# Altium PCB main.PcbDoc
Units mil, origin at the board's own origin, x right, y up, seen from the top; angles counter-clockwise.
Board outline 2165.35 x 3740.16 mil, 2 copper layers (Top Layer, Bottom Layer); 55 components, 37 nets, 239 pads, 53 vias.
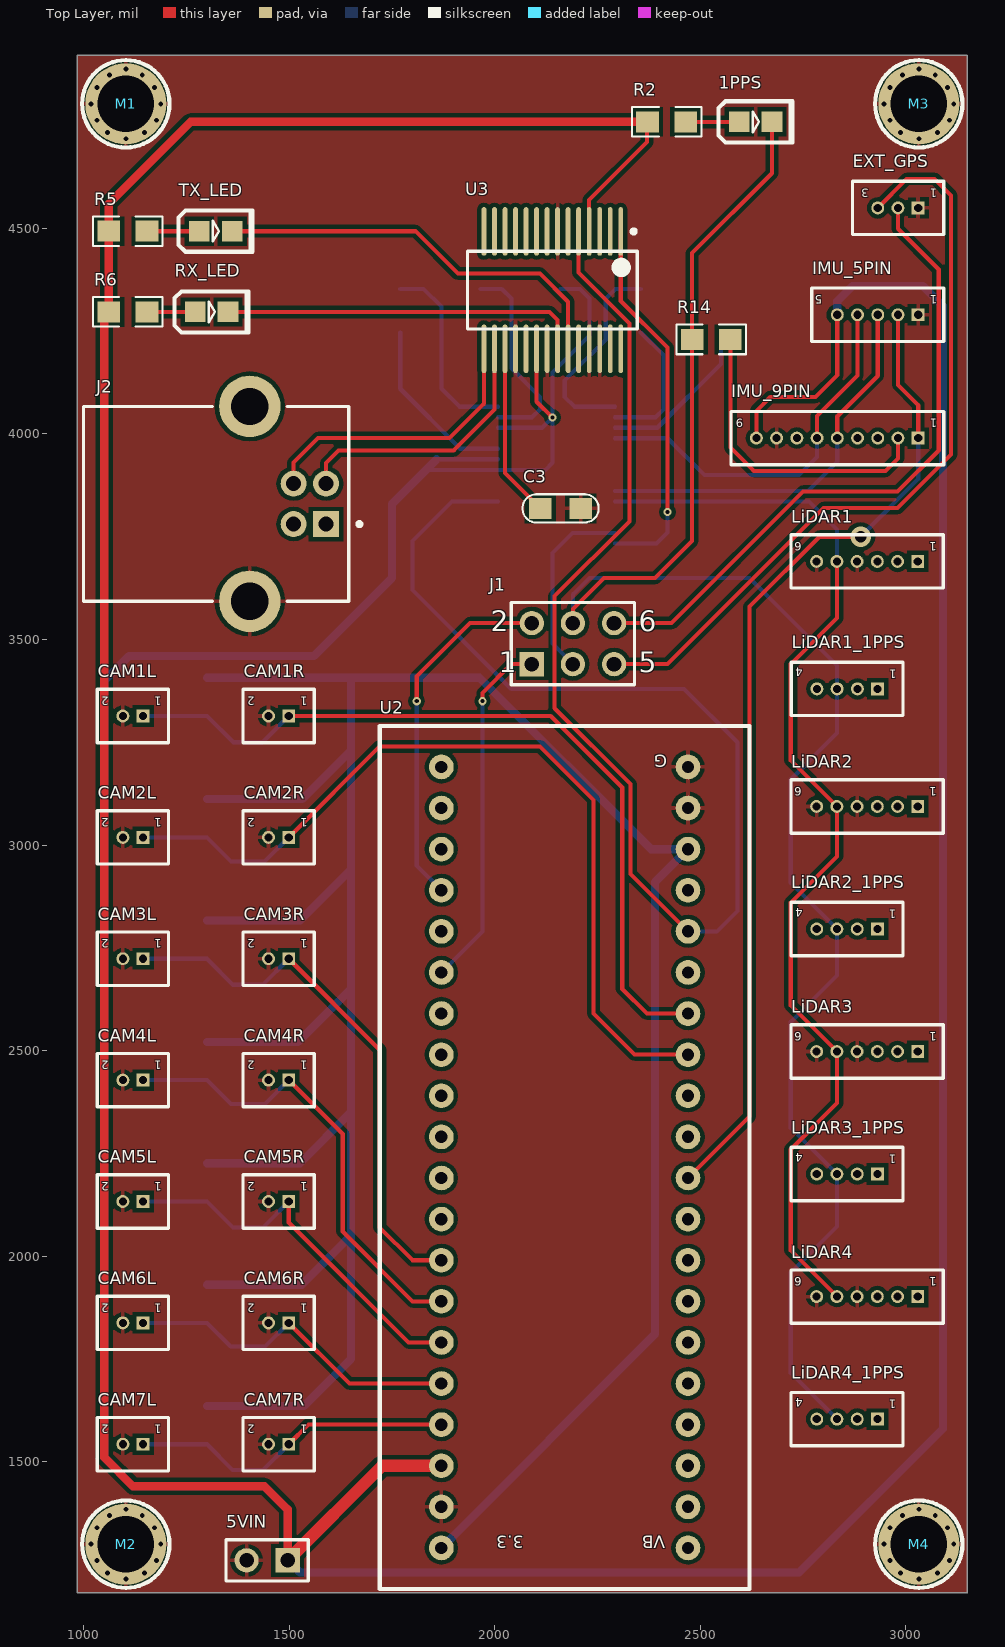
[diagram p0: Top Layer view]
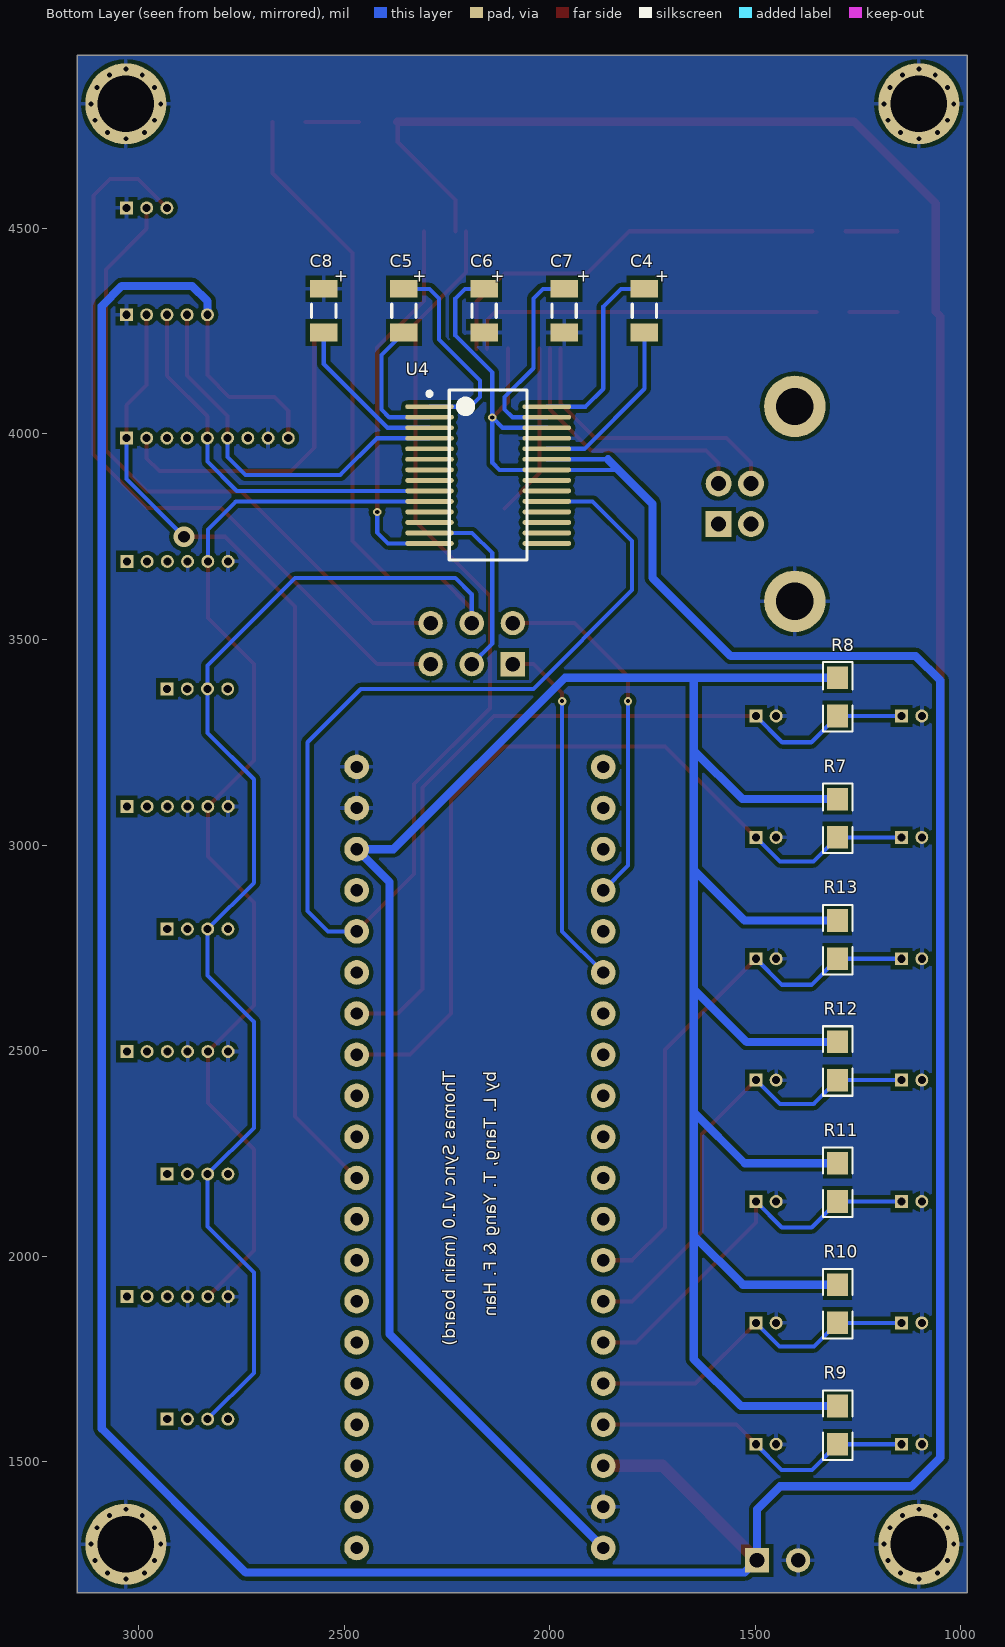
[diagram p1: Bottom Layer view, seen from below]

## Layer stack, top to bottom
Top Solder: solder mask 0.4, Solder Resist, Dk 3.5
Top Layer: signal copper 1.4
Dielectric 1: dielectric 12.6, FR-4, Dk 4.8
Bottom Layer: signal copper 1.4
Bottom Solder: solder mask 0.4, Solder Resist, Dk 3.5

## Board outline
984.25,4921.26 3149.61,4921.26 3149.61,1181.1 984.25,1181.1

## Design rules (kind name [scope] priority, off if disabled: settings)
Clearance [All] p1: gap=10
HoleSize [All] p1: absolutevalues=TRUE maxlimit=157.48 minlimit=0.98 maxpercent=80.000 minpercent=20.000
PolygonConnect [All] p1: connectstyle=Relief reliefconductorwidth=10 reliefentries=4 polygonreliefangle="90 Angle" airgapwidth=10
RoomDefinition main [InComponentClass('main')] p1: confinementstyle=ConfineIn formatcopy=TRUE lockcomponents=FALSE outline 984.25,1181.1 3149.61,1181.1 3149.61,4921.26 984.25,4921.26
RoutingVias [All] p1: holewidth=28 width=50 viastyle="Through Hole" minholewidth=28 minwidth=50 maxholewidth=28 maxwidth=50
SolderMaskExpansion [All] p1: expansion=4
Width [All] p1: maxlimit=80 minlimit=10 preferedwidth=10
29 further rules are at their usual default settings.

## Components (designator, comment, footprint, x,y, rotation, side; value= is the part's Value field where it differs from the comment)
1PPS "1PPS LED" 0805D 2594.33,4759.37 r0 top
5VIN "Header 2" HDR1X2 1496.06,1259.84 r180 top
C3 "0.1uF" 0805C 2204.72,3818.9 r180 top
C4 "0.1uF" C1206 1770,4300 r270 bottom
C5 "0.1uF" C1206 2355,4300 r270 bottom
C6 "0.1uF" C1206 2160,4300 r270 bottom
C7 "0.1uF" C1206 1965,4300 r270 bottom
C8 "0.1uF" C1206 2550,4300 r270 bottom
CAM1L "Header 2" 1.25mmP2 1144.33,3313.94 r180 top
CAM1R "Header 2" 1.25mmP2 1498.66,3313.94 r180 top
CAM2L "Header 2" 1.25mmP2 1144.33,3018.66 r180 top
CAM2R "Header 2" 1.25mmP2 1498.66,3018.66 r180 top
CAM3L "Header 2" 1.25mmP2 1144.33,2723.39 r180 top
CAM3R "Header 2" 1.25mmP2 1498.66,2723.39 r180 top
CAM4L "Header 2" 1.25mmP2 1144.33,2428.11 r180 top
CAM4R "Header 2" 1.25mmP2 1498.66,2428.11 r180 top
CAM5L "Header 2" 1.25mmP2 1144.33,2132.83 r180 top
CAM5R "Header 2" 1.25mmP2 1498.66,2132.83 r180 top
CAM6L "Header 2" 1.25mmP2 1144.33,1837.56 r180 top
CAM6R "Header 2" 1.25mmP2 1498.66,1837.56 r180 top
CAM7L "Header 2" 1.25mmP2 1144.33,1542.28 r180 top
CAM7R "Header 2" 1.25mmP2 1498.66,1542.28 r180 top
EXT_GPS "Header 3" 1.25mmP3 3030,4550 r180 top
IMU_5PIN "Header 5" 1.25mmP5 3030,4290 r180 top
IMU_9PIN "Header 9" 1.25mmP9 3030,3990 r180 top
J1 "Header 3X2" HDR2X3 2090,3440 r0 top
J2 "USB Header" USB2.5-2H4D 1550,3830 r180 top
LiDAR1 "Header 6" 1.25mmP6 3028.9,3690 r180 top
LiDAR1_1PPS "Header 4" 1.25mmP4 2931.26,3380 r180 top
LiDAR2 "Header 6" 1.25mmP6 3028.9,3093.82 r180 top
LiDAR2_1PPS "Header 4" 1.25mmP4 2930.83,2795.74 r180 top
LiDAR3 "Header 6" 1.25mmP6 3028.9,2497.65 r180 top
LiDAR3_1PPS "Header 4" 1.25mmP4 2930.83,2199.56 r180 top
LiDAR4 "Header 6" 1.25mmP6 3028.9,1901.47 r180 top
LiDAR4_1PPS "Header 4" 1.25mmP4 2930.83,1603.39 r180 top
M1 "Mount" 安装孔-3.5-5 1102.36,4803.15 r0 top
M2 "Mount" 安装孔-3.5-5 1102.36,1299.21 r0 top
M3 "Mount" 安装孔-3.5-5 3031.5,4803.15 r0 top
M4 "Mount" 安装孔-3.5-5 3031.5,1299.21 r0 top
R2 "1K" 0805R 2464.33,4759.37 r180 top
R5 "150R" 0805R 1060.94,4493.31 r0 top
R6 "120R" 0805R 1060.94,4297.01 r0 top
R7 "1K" 0805R 1300,3018.66 r90 bottom
R8 "1K" 0805R 1300,3313.94 r90 bottom
R9 "1K" 0805R 1300,1635.28 r270 bottom
R10 "1K" 0805R 1300,1930.56 r270 bottom
R11 "1K" 0805R 1300,2225.84 r270 bottom
R12 "1K" 0805R 1300,2521.11 r270 bottom
R13 "1K" 0805R 1300,2816.39 r270 bottom
R14 "0R" 0805R 2480,4230 r0 top
RX_LED "USB RX LED" 0805D 1270.94,4297.01 r0 top
TX_LED "USB TX LED" 0805D 1280.94,4493.31 r0 top
U2 "MCU" STM32Board 2170,2240 r180 top
U3 "FT232R" SSOP-28 2140,4350 r270 top
U4 "MAX3245" SSOP-28 2150,3900 r180 bottom

## Footprints (in the part's own frame and the unit in brackets; to place one, negate y for a bottom-side part, rotate by r counter-clockwise, add the part's x,y. Pads: shape width x height; smd on the part's side, far side on the other; paste and mask are expansions set on the pad)
1.25mmP2 [mm]
  rect 0.8x0.8 hole 0.5: 1(0,0)
  round 0.8 hole 0.5: 2(1.25,0)
  silkscreen extent -1.57,-1.65 2.83,1.65
1.25mmP3 [mm]
  rect 0.8x0.8 hole 0.5: 1(0,0)
  round 0.8 hole 0.5: 2(1.25,0) 3(2.5,0)
  silkscreen extent -1.58,-1.65 4.06,1.65
1.25mmP4 [mm]
  rect 0.8x0.8 hole 0.5: 1(0,0)
  round 0.8 hole 0.5: 2(1.25,0) 3(2.5,0) 4(3.75,0)
  silkscreen extent -1.58,-1.65 5.33,1.65
1.25mmP5 [mm]
  rect 0.8x0.8 hole 0.5: 1(0,0)
  round 0.8 hole 0.5: 2(1.25,0) 3(2.5,0) 4(3.75,0) 5(5,0)
  silkscreen extent -1.58,-1.65 6.57,1.65
1.25mmP6 [mm]
  rect 0.8x0.8 hole 0.5: 1(0,0)
  round 0.8 hole 0.5: 2(1.25,0) 3(2.5,0) 4(3.75,0) 5(5,0) 6(6.25,0)
  silkscreen extent -1.58,-1.65 7.82,1.65
1.25mmP9 [mm]
  rect 0.8x0.8 hole 0.5: 1(0,0)
  round 0.8 hole 0.5: 2(1.25,0) 3(2.5,0) 4(3.75,0) 5(5,0) 6(6.25,0) 7(7.5,0) 8(8.75,0) 9(10,0)
  silkscreen extent -1.58,-1.65 11.57,1.65
0805C [mm]
  rect 1.4x1.3 smd: 1(-0.102,0) 2(2.388,0)
  silkscreen extent -1.22,-0.88 3.49,0.87
0805D [mil] "二?"
  rect 50x50 smd: 1(0,0) 2(80,0)
  silkscreen extent -50,-50 130,50
0805R [mm]
  rect 1.4x1.3 smd: 1(0,0) 2(2.362,0)
  silkscreen extent -0.97,-0.91 3.33,0.91
C1206 [mm] "Chip Capacitor, Body 3.2x1.6mm, IPC High Density"
  rect 1.1x1.7 smd: 1(-1.35,0) 2(1.35,0)
  silkscreen extent -0.4,-0.75 0.4,0.75, body extent -1.7,-0.9 1.7,0.9, height 1.3
HDR1X2 [mm] "Connector; Header; 2 Position"
  rect 1.5x1.5 hole 0.9: 1(0,0)
  round 1.5 hole 0.9: 2(2.54,0)
  silkscreen extent -1.27,-1.27 3.81,1.27
HDR2X3 [mm] "Connector; Header; 3x2 Position"
  rect 1.5x1.5 hole 0.9: 1(0,0)
  round 1.5 hole 0.9: 2(0,2.54) 3(2.54,0) 4(2.54,2.54) 5(5.08,0) 6(5.08,2.54)
  silkscreen extent -1.27,-1.27 6.35,3.81
SSOP-28 [mm] "SOP, 28-Leads, Body 10.20x5.45mm, Pitch 0.65mm, IPC Medium Density"
  oval 3x0.3 smd: 1(-3.625,4.225) 2(-3.625,3.575) 3(-3.625,2.925) 4(-3.625,2.275) 5(-3.625,1.625) 6(-3.625,0.975) 7(-3.625,0.325) 8(-3.625,-0.325) 9(-3.625,-0.975) 10(-3.625,-1.625) 11(-3.625,-2.275) 12(-3.625,-2.925) 13(-3.625,-3.575) 14(-3.625,-4.225) 15(3.625,-4.225) 16(3.625,-3.575) 17(3.625,-2.925) 18(3.625,-2.275) 19(3.625,-1.625) 20(3.625,-0.975) 21(3.625,-0.325) 22(3.625,0.325) 23(3.625,0.975) 24(3.625,1.625) 25(3.625,2.275) 26(3.625,2.925) 27(3.625,3.575) 28(3.625,4.225)
  silkscreen extent -3.75,-5.25 2.4,5.25, body extent -2.8,-5.25 2.8,5.25, height 2
STM32Board [mil] "STM32 board"
  round 60 hole 30: 1(-300,950) 2(-300,850) 3(-300,750) 4(-300,650) 5(-300,550) 6(-300,450) 7(-300,350) 8(-300,250) 9(-300,150) 10(-300,50) 11(-300,-50) 12(-300,-150) 13(-300,-250) 14(-300,-350) 15(-300,-450) 16(-300,-550) 17(-300,-650) 18(-300,-750) 19(-300,-850) 20(-300,-950) 21(300,950) 22(300,850) 23(300,750) 24(300,650) 25(300,550) 26(300,450) 27(300,350) 28(300,250) 29(300,150) 30(300,50) 31(300,-50) 32(300,-150) 33(300,-250) 34(300,-350) 35(300,-450) 36(300,-550) 37(300,-650) 38(300,-750) 39(300,-850) 40(300,-950)
  silkscreen extent -450,-1050 450,1050
USB2.5-2H4D [mm] "Connector; USB1.1, Type B, Thru-Hole; 4 Position; Right Angle"
  rect 1.6x1.6 hole 0.92: 1(-1,1.25)
  round 1.6 hole 0.92: 2(-1,-1.25) 3(1,-1.25) 4(1,1.25)
  round 3.8 hole 2.3: 5(3.71,6.02) 6(3.71,-6.02)
  silkscreen extent -3.18,-6.02 13.99,6.02
安装孔-3.5-5 [mm]
  round 5 hole 3.5: 1(0,0)
  silkscreen extent -2.7,-2.7 2.7,2.7

## Part data
1PPS: library part LED2, "BLUE"
5VIN CAM1L CAM1R CAM2L CAM2R CAM3L CAM3R CAM4L CAM4R CAM5L CAM5R CAM6L CAM6R CAM7L CAM7R: "Header, 2-Pin"
C3: library part Cap, "Capacitor"
C4 C5 C6 C7 C8: library part "Cap Pol3", "Polarized Capacitor (Surface Mount)"
EXT_GPS: "Header, 3-Pin"
IMU_5PIN: "Header, 5-Pin"
IMU_9PIN: "Header, 9-Pin"
J1: "Header, 3-Pin, Dual row"
J2: library part USB
LiDAR1 LiDAR2 LiDAR3 LiDAR4: "Header, 6-Pin"
LiDAR1_1PPS LiDAR2_1PPS LiDAR3_1PPS LiDAR4_1PPS: "Header, 4-Pin"
M1 M2 M3 M4: library part Plug, "Plug"
R2 R5 R6 R7 R8 R9 R10 R11 R12 R13 R14: library part Res1, "Resistor"
RX_LED: library part LED2, "GREEN"
TX_LED: library part LED2, "YELLOW"

## Via types
v1: diameter 25, hole 12, Top Layer to Bottom Layer, 48 vias
v2: diameter 20, hole 10, Top Layer to Bottom Layer, 4 vias
v3: diameter 50, hole 28, Top Layer to Bottom Layer, 1 vias

## Nets (pads, with @x,y where several pads share a name; then routed paths per layer and width w, separated by ;. In a path a pad name is that pad's centre, name@x,y a point inside that pad or via, vN(x,y) a via of type N, cw(c..) or ccw(c..) an arc to the next point about the centre after c; other vN are vias at no path point)
1PPS: 1PPS.2 J1.4 LiDAR1_1PPS.3 LiDAR2_1PPS.3 LiDAR3_1PPS.3 LiDAR4_1PPS.3 R14.1 | length 4423.9
  Top Layer w10: J1.4 2190,3574.69 2265.31,3650 2390,3650 2480,3740 R14.1 2480,4440 2674.33,4634.33 1PPS.2
  Bottom Layer w10: J1.4 2190,3610 2230,3650 2620,3650 2832.83,3437.17 LiDAR1_1PPS.3 2832.83,3272.83 2720,3160 2720,2908.14 LiDAR2_1PPS.3 2832.4,2682.4 2720,2570 2720,2311.96 LiDAR3_1PPS.3 2832.4,2072.4 2720,1960 2720,1715.79 LiDAR4_1PPS.3
GND: 5VIN.2 C3.1 C6.2 C7.2 C8.1 CAM1L.2 CAM1R.2 CAM2L.2 CAM2R.2 CAM3L.2 CAM3R.2 CAM4L.2 CAM4R.2 CAM5L.2 CAM5R.2 CAM6L.2 CAM6R.2 CAM7L.2 CAM7R.2 EXT_GPS.1 IMU_5PIN.1 IMU_9PIN.8 J2.5 LiDAR1.4 LiDAR1.6 LiDAR2.4 LiDAR2.6 LiDAR3.4 LiDAR3.6 LiDAR4.4 LiDAR4.6 M1.1 M2.1 M3.1 M4.1 U2.19 U2.20 U2.22 U3.7 U3.18 U3.21 U3.25 U3.26 U4.25
  other v1: 1102.36,1214.21 3031.5,1214.21 1057.36,1229.21 1147.36,1229.21 2986.5,1229.21 3076.5,1229.21 1032.36,1259.21 1177.36,1259.21 2961.5,1259.21 3106.5,1259.21 1017.36,1299.21 1187.36,1299.21 2946.5,1299.21 3116.5,1299.21 1032.36,1339.21 1172.36,1339.21 2961.5,1339.21 3101.5,1339.21 1062.36,1369.21 1142.36,1369.21 2991.5,1369.21 3071.5,1369.21 1102.36,1384.21 3031.5,1384.21 1102.36,4718.15 3031.5,4718.15 1057.36,4733.15 1147.36,4733.15 2986.5,4733.15 3076.5,4733.15 1032.36,4763.15 1177.36,4763.15 2961.5,4763.15 3106.5,4763.15 1017.36,4803.15 1187.36,4803.15 2946.5,4803.15 3116.5,4803.15 1032.36,4843.15 1172.36,4843.15 2961.5,4843.15 3101.5,4843.15 1062.36,4873.15 1142.36,4873.15 2991.5,4873.15 3071.5,4873.15 1102.36,4888.15 3031.5,4888.15
GPS_1PPS: EXT_GPS.2 J1.6 | length 1595.1
  Top Layer w10: J1.6 2430,3540 2750,3860 2980,3860 3080,3960 3080,4400 2980.79,4499.21 EXT_GPS.2
GPS_MSG: EXT_GPS.3 J1.5 | length 1885.2
  Top Layer w10: J1.5 2420,3440 2800,3820 2980,3820 3110,3950 3110,4580 3070,4620 3001.57,4620 EXT_GPS.3
IMU_RX: U3.1 U4.14 | length 918
  Top Layer w10: U3.1 2306.34,4323.66 2420,4210 v2(2420,3810)
  Bottom Layer w10: U4.14 2393.66,3733.66 2420,3760 v2(2420,3810)
IMU_RX_232: IMU_5PIN.3 IMU_9PIN.5 U4.9 | length 967.7
  Top Layer w10: IMU_9PIN.5 2833.15,4043.15 2931.57,4141.57 IMU_5PIN.3
  Bottom Layer w10: U4.9 2761.61,3861.61 2833.15,3933.15 IMU_9PIN.5
IMU_SYNCOUT: IMU_5PIN.2 IMU_9PIN.1 U2.10 | length 2410.9
  Top Layer w10: U2.10 2620,2340 2620,3580 2790,3750 v3(2890,3750) ; IMU_5PIN.2 2980.79,4119.21 3030,4070 IMU_9PIN.1
  Bottom Layer w10: v3(2890,3750) 3030,3890 IMU_9PIN.1
IMU_TX: U2.16 U3.5 U4.19 | length 3824.5
  Top Layer w10: U3.5 2203.98,4392.36 2327.24,4269.09 2327.24,3787.24 2145.47,3605.47 2145.47,3332.81 2330,3148.28 2330,2930 U2.16
  Bottom Layer w10: U4.19 1896.02,3836.02 1800,3740 1800,3620 2040,3380 2460,3380 2590,3250 2590,2840 2540,2790 U2.16
IMU_TX_232: IMU_5PIN.4 IMU_9PIN.6 U4.4 | length 933.4
  Top Layer w10: IMU_9PIN.6 2783.94,4043.94 2882.36,4142.36 IMU_5PIN.4
  Bottom Layer w10: U4.4 2420.43,3989.57 2510,3900 2740,3900 2783.94,3943.94 IMU_9PIN.6
MCU_1PPS: J1.2 U2.37 | length 878.7
  Top Layer w10: v2(1810,3350) 1810,3410 1940,3540 J1.2
  Bottom Layer w10: v2(1810,3350) 1810,2950 U2.37
MCU_MSG: J1.1 U2.35 | length 870.4
  Top Layer w10: v2(1970,3350) 1970,3370 2040,3440 J1.1
  Bottom Layer w10: U2.35 1970,2790 v2(1970,3350)
MSG: J1.3 U4.13 | length 463.8
  Bottom Layer w10: J1.3 2140,3490 2140,3710 2189.25,3759.25 U4.13
MSG_232: LiDAR1.5 LiDAR2.5 LiDAR3.5 LiDAR4.5 U4.10 | length 2712.5
  Top Layer w10: LiDAR4.5 2720,2013.52 2720,2260 2832.05,2372.05 LiDAR3.5 2720,2609.7 2720,2860 2832.05,2972.05 LiDAR2.5 2720,3205.87 2720,3440 2832.05,3552.05 LiDAR1.5
  Bottom Layer w10: U4.10 2763.98,3836.02 2832.05,3767.95 LiDAR1.5
Net1PPS_1: 1PPS.1 R2.1 | length 130
  Top Layer w10: R2.1 1PPS.1
NetC3_2: C3.2 U3.17 | length 424
  Top Layer w10: U3.17 2024.84,3904.78 C3.2
NetC4_1: C4.1 U4.28 | length 473.2
  Bottom Layer w10: C4.1 1826.85,4353.15 1870,4310 1870,4110 1913.66,4066.34 U4.28
NetC4_2: C4.2 U4.24 | length 434.6
  Bottom Layer w10: C4.2 1770,4110 1916.02,3963.98 U4.24
NetC5_1: C5.1 U4.1 | length 508.5
  Bottom Layer w10: U4.1 2193.66,4066.34 2170,4090 2170,4130 2270,4230 2270,4330 2293.15,4353.15 C5.1
NetC5_2: C5.2 U4.2 | length 334.9
  Bottom Layer w10: U4.2 2390.75,4040.75 2410,4060 2410,4191.85 C5.2
NetC7_1: C7.1 U4.27 | length 494.3
  Bottom Layer w10: C7.1 2016.85,4353.15 2040.14,4329.86 2040.14,4159.86 2110,4090 2110,4060 2090.75,4040.75 U4.27
NetC8_2: C8.2 U4.3 | length 398.3
  Bottom Layer w10: U4.3 2395.16,4015.16 2550,4170 C8.2
NetIMU_9PIN_2: IMU_9PIN.2 R14.2 | length 756.4
  Top Layer w10: R14.2 2573,3967 2630,3910 2950,3910 2980.79,3940.79 IMU_9PIN.2
NetJ2_2: J2.2 U3.16 | length 661.9
  Top Layer w10: J2.2 1589.37,3929.37 1620,3960 1900,3960 1999.25,4059.25 U3.16
NetJ2_3: J2.3 U3.15 | length 707.3
  Top Layer w10: J2.3 1510.63,3930.63 1570,3990 1890,3990 1973.66,4073.66 U3.15
NetR5_2: R5.2 TX_LED.1 | length 127
  Top Layer w10: R5.2 TX_LED.1
NetR6_2: R6.2 RX_LED.1 | length 117
  Top Layer w10: R6.2 RX_LED.1
NetRX_LED_2: RX_LED.2 U3.22 | length 880
  Top Layer w10: RX_LED.2 2132.99,4297.01 2152.8,4277.2 U3.22
NetTX_LED_2: TX_LED.2 U3.23 | length 1002.9
  Top Layer w10: TX_LED.2 1806.69,4493.31 1910,4390 2110,4390 2178.39,4321.61 U3.23
SYNCIN1: CAM1L.1 CAM1R.1 R8.1 U2.14 | length 1965.5
  Top Layer w10: CAM1R.1 2136.06,3313.94 2310,3140 2310,2650 2370,2590 U2.14
  Bottom Layer w10: CAM1L.1 R8.1 1363.94,3250 1434.72,3250 CAM1R.1
SYNCIN2: CAM2L.1 CAM2R.1 R7.1 U2.13 | length 2081.2
  Top Layer w10: CAM2R.1 1720,3240 2110,3240 2240,3110 2240,2590 2340,2490 U2.13
  Bottom Layer w10: CAM2L.1 R7.1 1358.66,2960 1440,2960 CAM2R.1
SYNCIN3: CAM3L.1 CAM3R.1 R13.2 U2.28 | length 1335
  Top Layer w10: CAM3R.1 1720,2502.05 1720,2070 1800,1990 U2.28
  Bottom Layer w10: CAM3L.1 R13.2 1363.39,2660 1435.28,2660 CAM3R.1
SYNCIN4: CAM4L.1 CAM4R.1 R12.2 U2.27 | length 1135.4
  Top Layer w10: CAM4R.1 1630,2296.77 1630,2060 1800,1890 U2.27
  Bottom Layer w10: CAM4L.1 R12.2 1358.11,2370 1440.55,2370 CAM4R.1
SYNCIN5: CAM5L.1 CAM5R.1 R11.2 U2.26 | length 949.9
  Top Layer w10: CAM5R.1 1498.66,2081.34 1790,1790 U2.26
  Bottom Layer w10: CAM5L.1 R11.2 1362.83,2070 1435.83,2070 CAM5R.1
SYNCIN6: CAM6L.1 CAM6R.1 R10.2 U2.25 | length 834.5
  Top Layer w10: CAM6R.1 1646.22,1690 U2.25
  Bottom Layer w10: CAM6L.1 R10.2 1357.56,1780 1441.1,1780 CAM6R.1
SYNCIN7: CAM7L.1 CAM7R.1 R9.2 U2.24 | length 797
  Top Layer w10: CAM7R.1 1546.38,1590 U2.24
  Bottom Layer w10: CAM7L.1 R9.2 1362.28,1480 1436.38,1480 CAM7R.1
VDD_3V3: R7.2 R8.2 R9.1 R10.1 R11.1 R12.1 R13.1 U2.18 U2.21 | length 7350.2
  Bottom Layer w20: R9.1 1535.28,1635.28 1650,1750 1650,2050 ; R10.1 1530.56,1930.56 1650,2050 ; R11.1 1525.84,2225.84 1650,2350 ; R12.1 1521.11,2521.11 1650,2650 ; R13.1 1526.39,2816.39 1650,2940 ; R7.2 1531.66,3111.66 1650,3230 ; R8.2 1650,3406.94 ; U2.21 2390,1810 2390,2910 U2.18 2380,2990 1963.06,3406.94 1650,3406.94 ; 1650,2050 1650,2350 ; 1650,2350 1650,2650 ; 1650,2650 1650,2940 ; 1650,2940 1650,3230 ; 1650,3230 1650,3406.94
VDD_5V: 5VIN.1 C6.1 IMU_5PIN.5 IMU_9PIN.9 R2.2 R5.1 R6.1 U2.23 U3.4 U3.20 U4.22 U4.23 U4.26 | length 16064.8
  Top Layer w10: U3.20 2101.61,4078.39 v2(2140,4040) ; U3.4 2229.57,4569.57 2370,4710 R2.2@2370,4750 ; IMU_9PIN.9 2636.3,4056.3 2670,4090 2780,4090 2833.15,4143.15 IMU_5PIN.5
  Top Layer w20: 5VIN.1 1496.06,1383.94 1440,1440 1120,1440 1050,1510 1050,4286.06 R6.1 R5.1 1060.94,4560.94 1259.37,4759.37 R2.2
  Top Layer w30: 5VIN.1 1726.22,1490 U2.23
  Bottom Layer w10: 1832.8,3912.8 U4.22 2122.8,3912.8 2140,3930 v2(2140,4040) ; 1858.39,3938.39 U4.23 ; U4.26 2115.16,4015.16 v2(2140,4040) ; C6.1 2206.85,4353.15 2230,4330 2230,4240 2140,4150 v2(2140,4040)
  Bottom Layer w20: 1858.39,3938.39 1832.8,3912.8 1750,3830 1750,3650 1560,3460 1110,3460 1050,3400 1050,1510 1120,1440 1440,1440 1496.06,1383.94 5VIN.1 1525.91,1230 2740,1230 3090,1580 3090,4311.57 3041.57,4360 2870,4360 2833.15,4323.15 IMU_5PIN.5
pads on no net: IMU_9PIN.3 IMU_9PIN.4 IMU_9PIN.7 J2.1 J2.4 J2.6 LiDAR1.1 LiDAR1.2 LiDAR1.3 LiDAR1_1PPS.1 LiDAR1_1PPS.2 LiDAR1_1PPS.4 LiDAR2.1 LiDAR2.2 LiDAR2.3 LiDAR2_1PPS.1 LiDAR2_1PPS.2 LiDAR2_1PPS.4 LiDAR3.1 LiDAR3.2 LiDAR3.3 LiDAR3_1PPS.1 LiDAR3_1PPS.2 LiDAR3_1PPS.4 LiDAR4.1 LiDAR4.2 LiDAR4.3 LiDAR4_1PPS.1 LiDAR4_1PPS.2 LiDAR4_1PPS.4 U2.1 U2.2 U2.3 U2.4 U2.5 U2.6 U2.7 U2.8 U2.9 U2.11 U2.12 U2.15 U2.17 U2.29 U2.30 U2.31 U2.32 U2.33 U2.34 U2.36 U2.38 U2.39 U2.40 U3.2 U3.3 U3.6 U3.8 U3.9 U3.10 U3.11 U3.12 U3.13 U3.14 U3.19 U3.24 U3.27 U3.28 U4.5 U4.6 U4.7 U4.8 U4.11 U4.12 U4.15 U4.16 U4.17 U4.18 U4.20 U4.21

## Polygon pours and split planes (outlines as drawn)
GND on Bottom Layer "Top Layer-No Net" (solid, pour order 4): 984.25,4921.26 3149.61,4921.26 3149.61,1181.1 984.25,1181.1
GND on Top Layer "Top Layer-No Net" (solid, pour order 6): 984.25,4921.26 3149.61,4921.26 3149.61,1181.1 984.25,1181.1

## Silkscreen, mask and mechanical layers (free items; w line width, h text height)
Bottom Overlay:
  text "+" at 1710,4370 h30
  text "+" at 1900,4370 h30
  text "+" at 2110,4370 h30
  text "+" at 2300,4370 h30
  text "+" at 2490,4370 h30
  text "by L. Tang, T. Yang & F. Han" at 2130,2450 h30 r270
  text "Thomas Sync v1.0 (main board)" at 2230,2450 h30 r270
Mechanical 1:
  lines w10: 984.25,4921.26 3149.61,4921.26 3149.61,1181.1 ; 984.25,4921.26 984.25,4921.26 ; 984.25,4921.26 984.25,1181.1 3149.61,1181.1 ; 3149.61,1181.1 3149.61,1181.1

## Text inside footprints (layer, text, board x,y; h text height)
CAM1L: Top Overlay "1" at 1190.33,3360.94 h20 r180; Top Overlay "2" at 1061.33,3360.94 h20 r180
CAM1R: Top Overlay "1" at 1544.66,3360.94 h20 r180; Top Overlay "2" at 1415.66,3360.94 h20 r180
CAM2L: Top Overlay "1" at 1190.33,3065.66 h20 r180; Top Overlay "2" at 1061.33,3065.66 h20 r180
CAM2R: Top Overlay "1" at 1544.66,3065.66 h20 r180; Top Overlay "2" at 1415.66,3065.66 h20 r180
CAM3L: Top Overlay "1" at 1190.33,2770.39 h20 r180; Top Overlay "2" at 1061.33,2770.39 h20 r180
CAM3R: Top Overlay "1" at 1544.66,2770.39 h20 r180; Top Overlay "2" at 1415.66,2770.39 h20 r180
CAM4L: Top Overlay "1" at 1190.33,2475.11 h20 r180; Top Overlay "2" at 1061.33,2475.11 h20 r180
CAM4R: Top Overlay "1" at 1544.66,2475.11 h20 r180; Top Overlay "2" at 1415.66,2475.11 h20 r180
CAM5L: Top Overlay "1" at 1190.33,2179.83 h20 r180; Top Overlay "2" at 1061.33,2179.83 h20 r180
CAM5R: Top Overlay "1" at 1544.66,2179.83 h20 r180; Top Overlay "2" at 1415.66,2179.83 h20 r180
CAM6L: Top Overlay "1" at 1190.33,1884.56 h20 r180; Top Overlay "2" at 1061.33,1884.56 h20 r180
CAM6R: Top Overlay "1" at 1544.66,1884.56 h20 r180; Top Overlay "2" at 1415.66,1884.56 h20 r180
CAM7L: Top Overlay "1" at 1190.33,1589.28 h20 r180; Top Overlay "2" at 1061.33,1589.28 h20 r180
CAM7R: Top Overlay "1" at 1544.66,1589.28 h20 r180; Top Overlay "2" at 1415.66,1589.28 h20 r180
EXT_GPS: Top Overlay "3" at 2910,4597 h20 r180; Top Overlay "1" at 3076,4597 h20 r180
IMU_5PIN: Top Overlay "5" at 2796,4337 h20 r180; Top Overlay "1" at 3076,4337 h20 r180
IMU_9PIN: Top Overlay "1" at 3076,4037 h20 r180; Top Overlay "9" at 2604,4037 h20 r180
J1: Top Overlay "6" at 2350,3520 h50; Top Overlay "5" at 2350,3420 h50; Top Overlay "2" at 1990,3520 h50; Top Overlay "1" at 2010,3420 h50
LiDAR1: Top Overlay "6" at 2746.9,3737 h20 r180; Top Overlay "1" at 3074.9,3737 h20 r180
LiDAR1_1PPS: Top Overlay "4" at 2749.26,3431 h20 r180; Top Overlay "1" at 2977.26,3427 h20 r180
LiDAR2: Top Overlay "6" at 2746.9,3140.82 h20 r180; Top Overlay "1" at 3074.9,3140.82 h20 r180
LiDAR2_1PPS: Top Overlay "4" at 2748.83,2846.74 h20 r180; Top Overlay "1" at 2976.83,2842.74 h20 r180
LiDAR3: Top Overlay "6" at 2746.9,2544.65 h20 r180; Top Overlay "1" at 3074.9,2544.65 h20 r180
LiDAR3_1PPS: Top Overlay "4" at 2748.83,2250.56 h20 r180; Top Overlay "1" at 2976.83,2246.56 h20 r180
LiDAR4: Top Overlay "6" at 2746.9,1948.47 h20 r180; Top Overlay "1" at 3074.9,1948.47 h20 r180
LiDAR4_1PPS: Top Overlay "4" at 2748.83,1654.39 h20 r180; Top Overlay "1" at 2976.83,1650.39 h20 r180
U2: Top Overlay "VB" at 2415,1320 h30 r180; Top Overlay "G" at 2420,3220 h30 r180; Top Overlay "3.3" at 2070,1320 h30 r180